# Altium PCB PCB1.PcbDoc
Units mm, origin at the board's own origin, x right, y up, seen from the top; angles counter-clockwise.
Board outline 39.93 x 25 mm, 4 copper layers (Top Layer, Layer 1, Layer 2, Bottom Layer), stack 1.883 mm thick; 39 components, 36 nets, 174 pads, 146 vias.
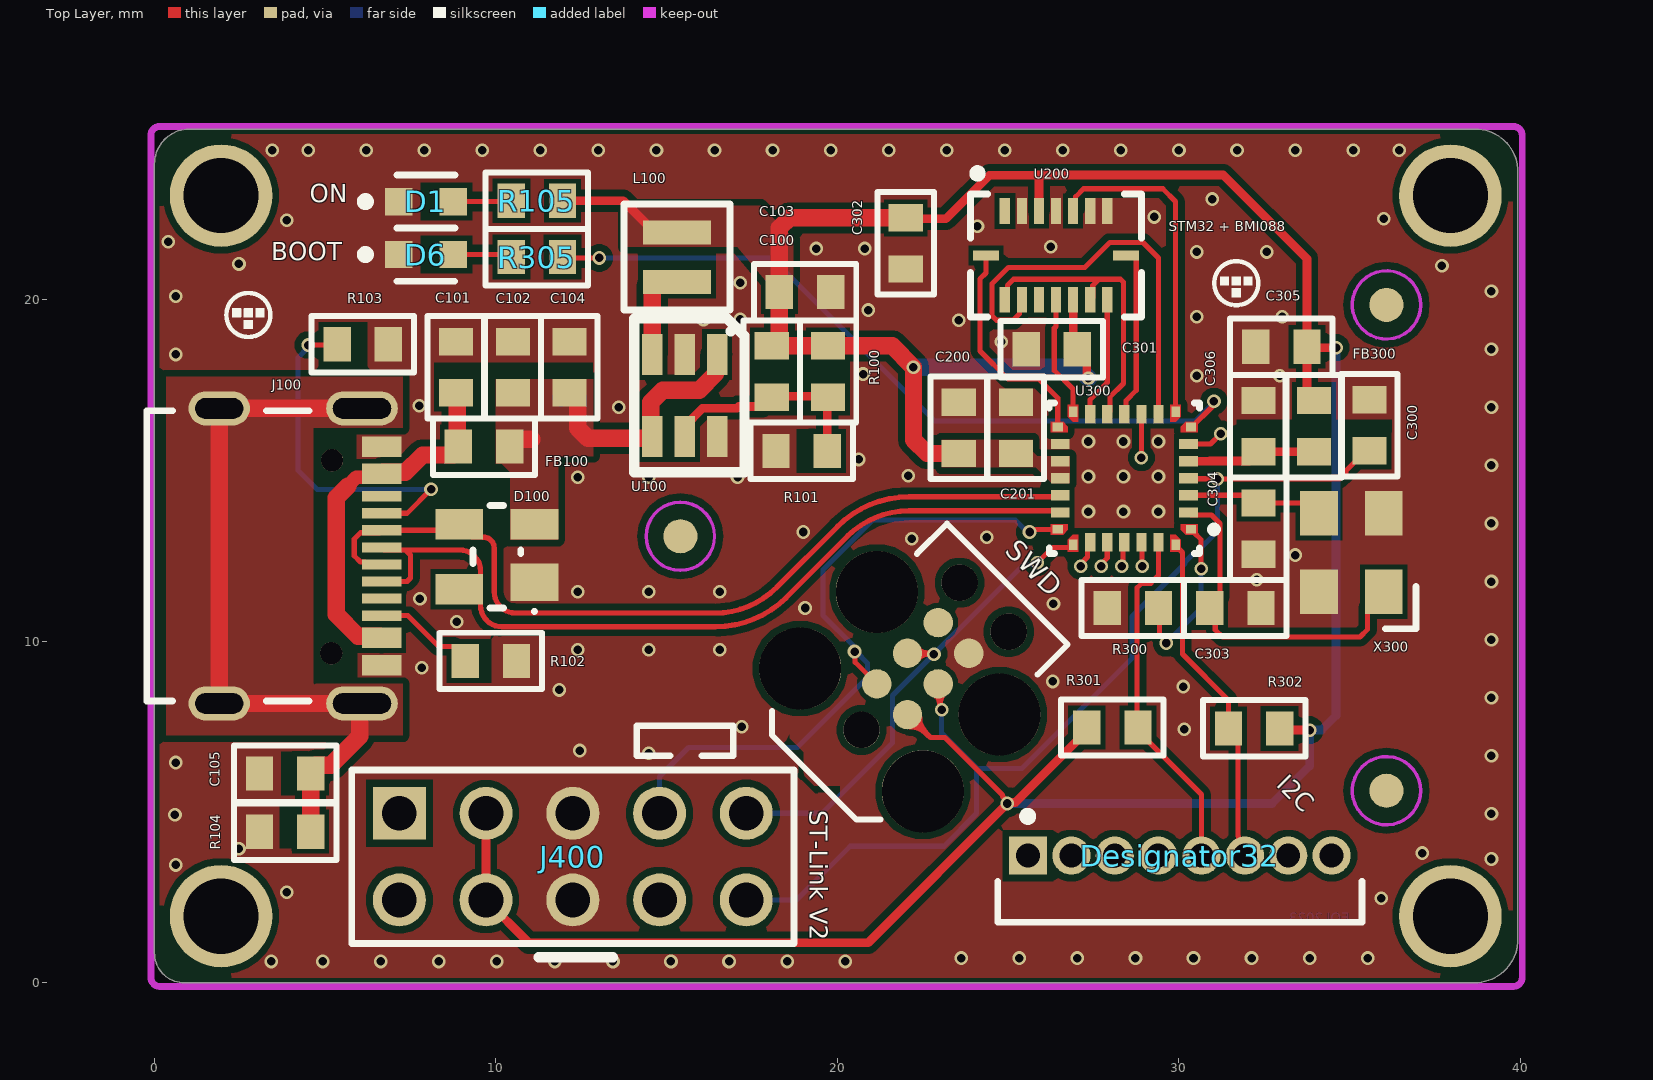
[diagram p0: Top Layer view]
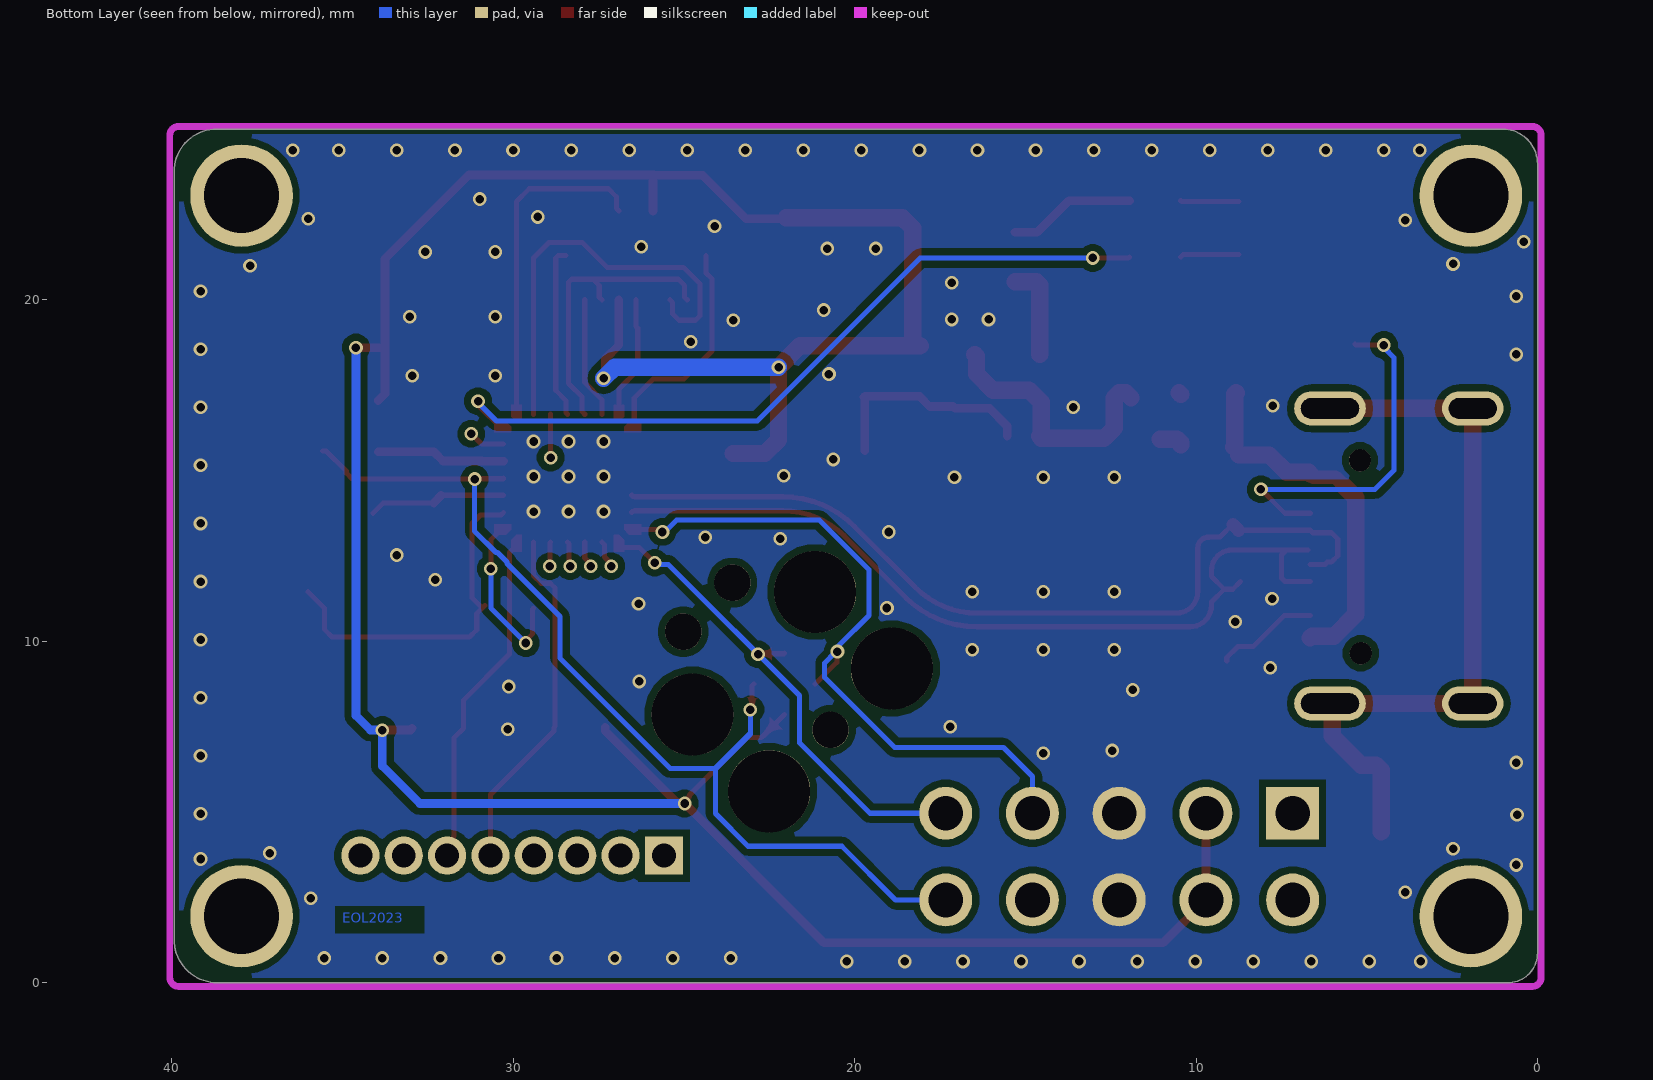
[diagram p1: Bottom Layer view, seen from below]
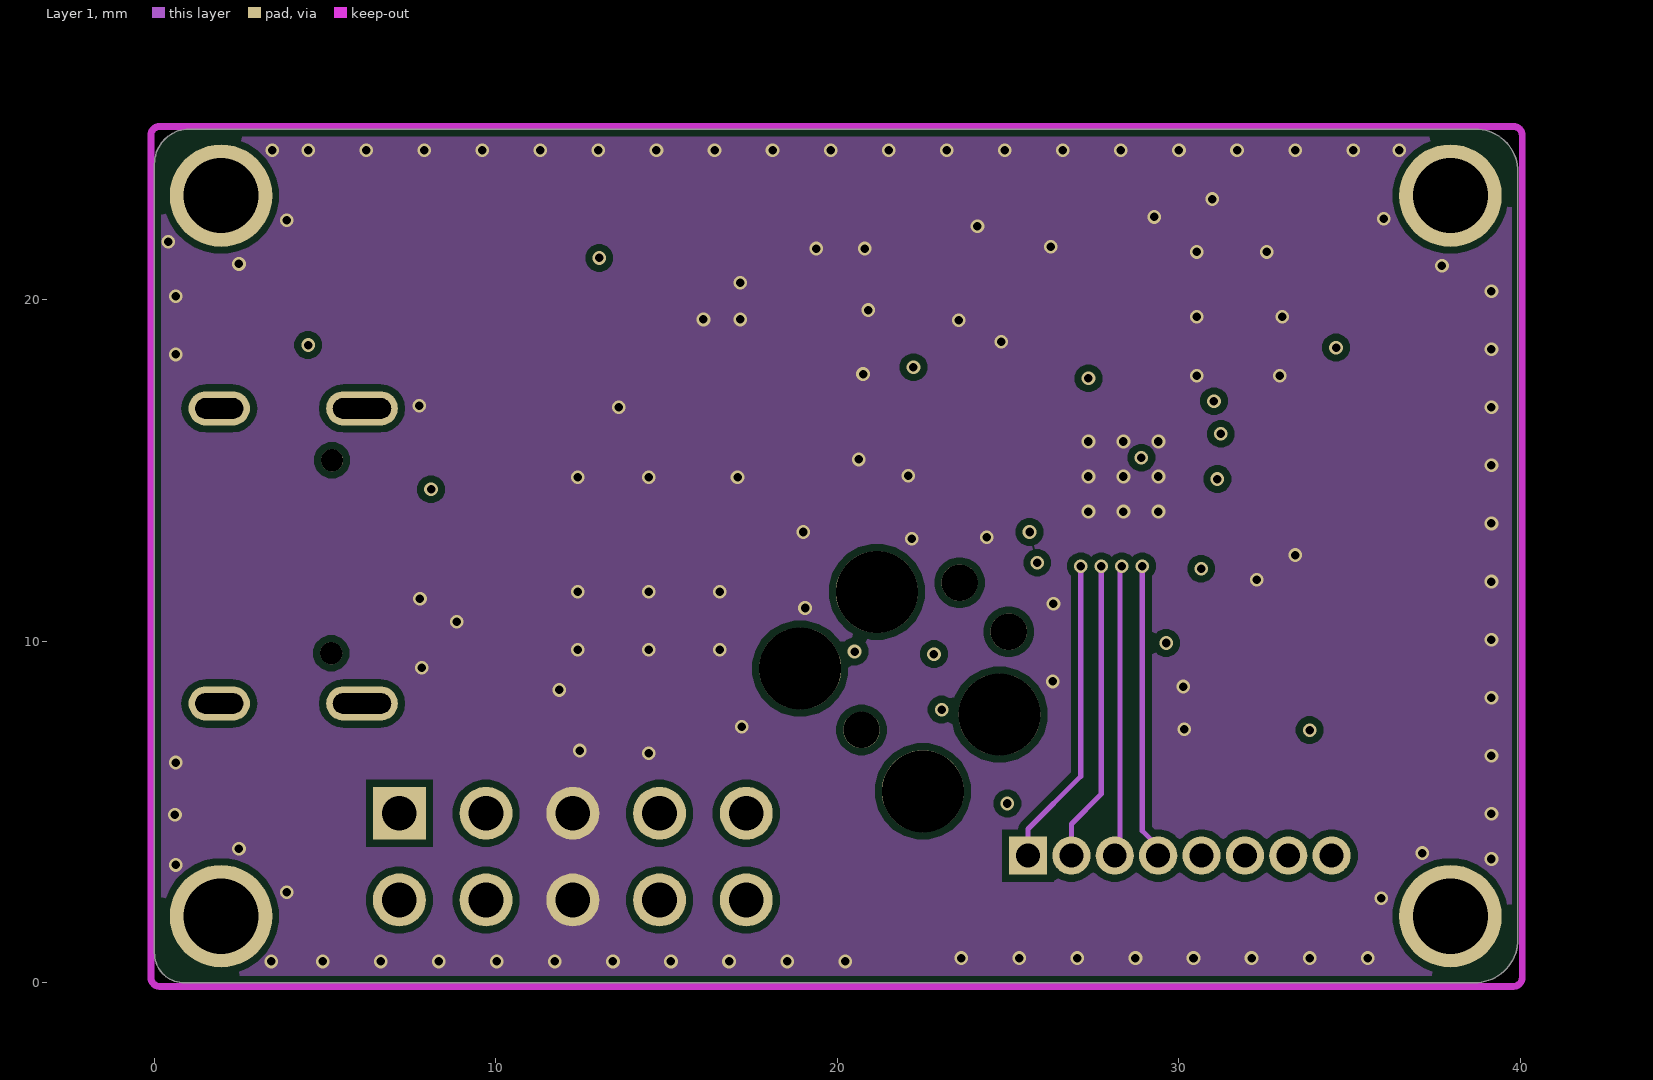
[diagram p2: Layer 1]
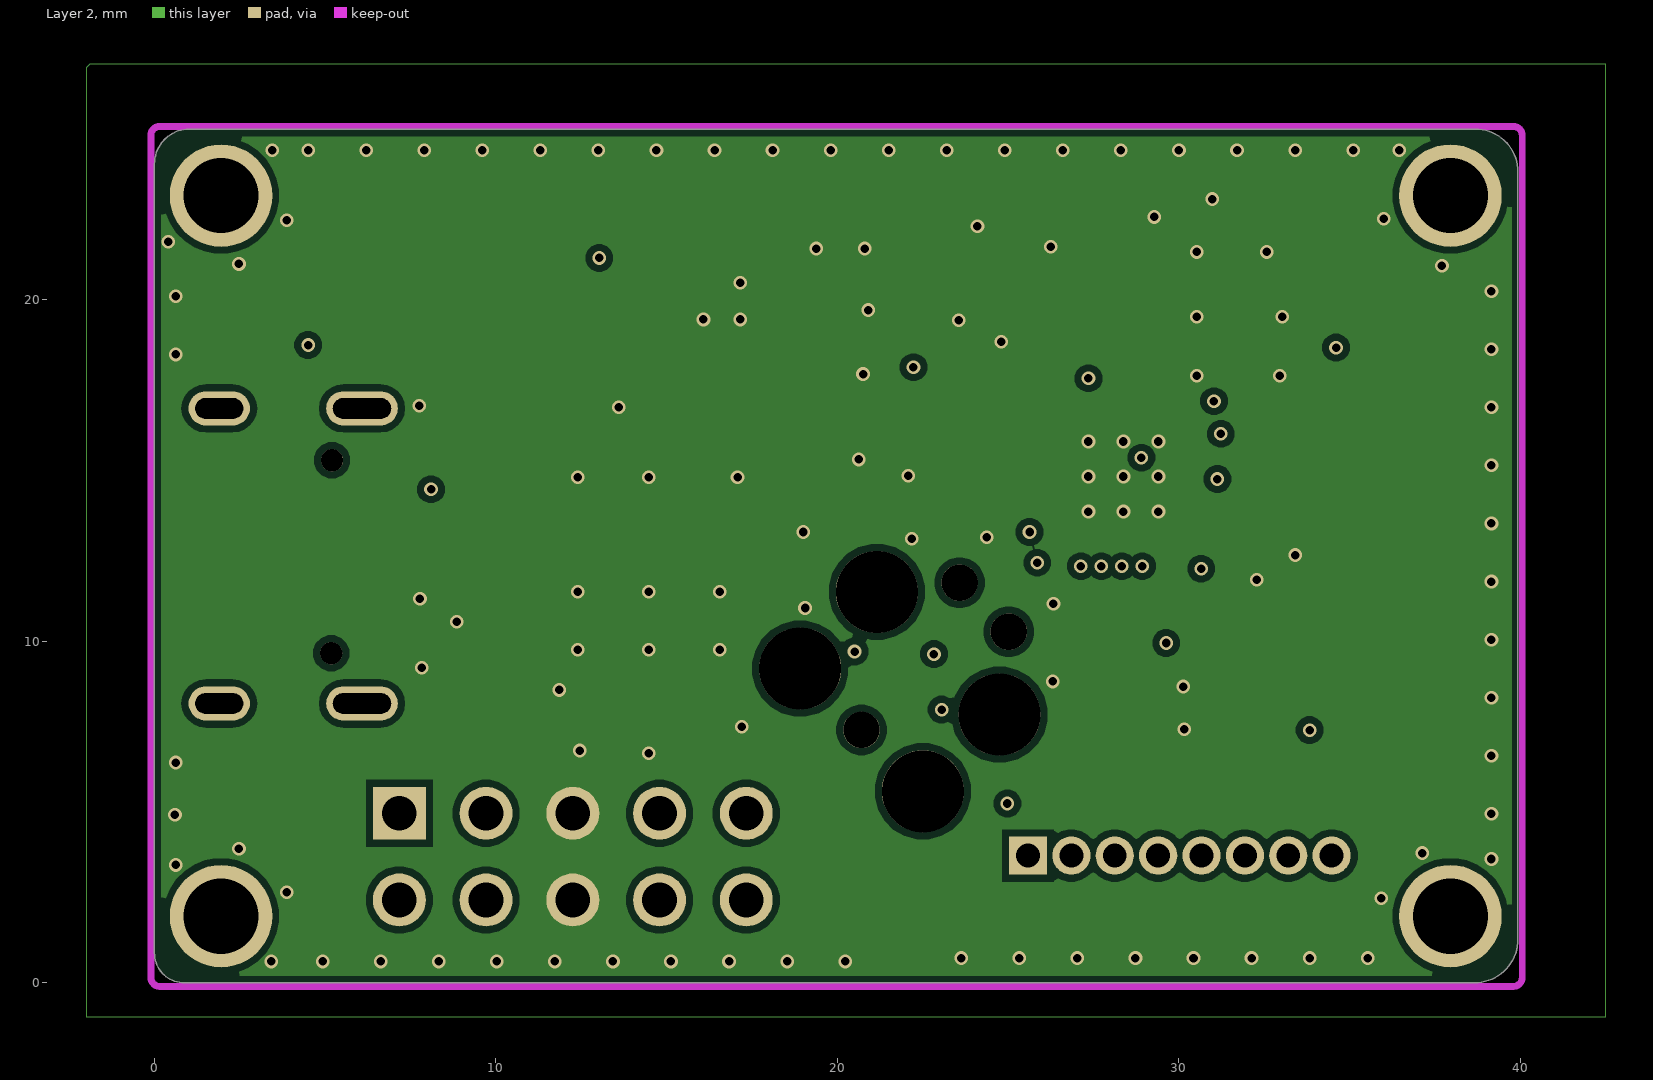
[diagram p3: Layer 2]
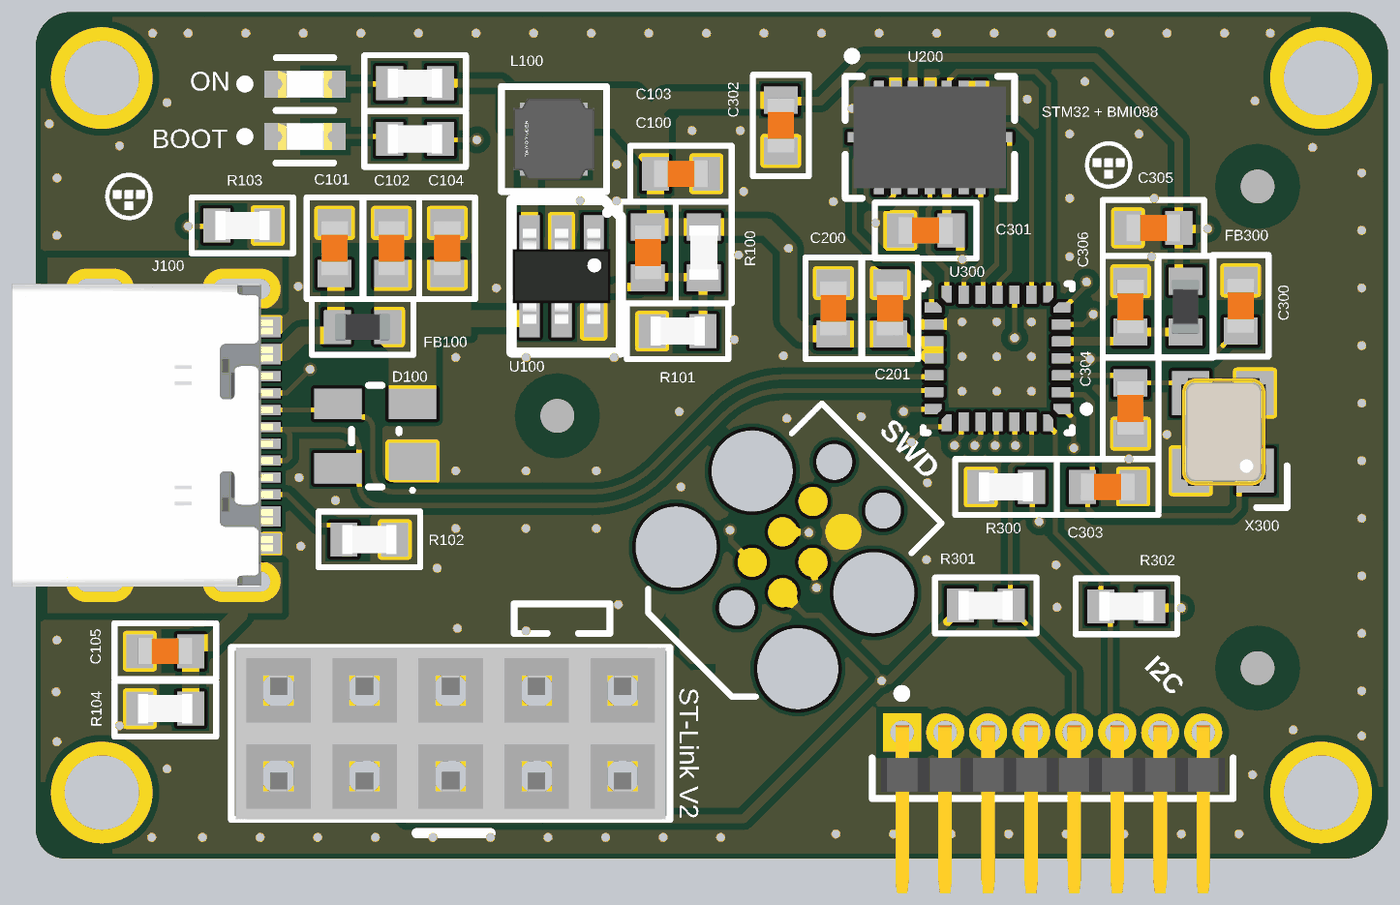
[diagram p4: 3D render of the assembled board from above, using the file's embedded part models]

## Layer stack, top to bottom
Top Solder: solder mask 0.0254, SM-001, Dk 4
Top Layer: signal copper 0.0356
Dielectric 2: prepreg 0.0711, PP-006, Dk 4.1
Layer 1: signal copper 0.035
Dielectric 1: dielectric 1.6, FR-4, Dk 4.6
Layer 2: signal copper 0.035
Dielectric 3: prepreg 0.0711, PP-006, Dk 4.1
Bottom Layer: signal copper 0.0356
Bottom Solder: solder mask 0.0254, SM-001, Dk 4

## Board outline
0,23.975 0,0.875 ccw(c0.875,0.875) 0.875,0 38.65,0 ccw(c38.65,1.275) 39.925,1.275 39.925,23.75 ccw(c38.675,23.75) 38.675,25 1.025,25 ccw(c1.025,23.975)

## Design rules (kind name [scope] priority, off if disabled: settings)
Clearance Clearance_3 [InNet('I2C_SCL') vs InNet('I2C_SDA')] p1: gap=0.2 ignorepadtopadclearanceinfootprint=FALSE except(0: Arc-Hole Track-Hole SMDPad-Hole THPad-Hole Via-Hole Fill-Hole Poly-Hole Region-Hole Text-Hole; 0.1: THPad-THPad; 0.127: SMDPad-SMDPad; 0.15: Arc-Arc Arc-Track Arc-SMDPad Track-Track Track-SMDPad SMDPad-Fill SMDPad-Poly SMDPad-Region; 0.254: Arc-Via Track-Via; 0.3: Arc-THPad Track-THPad SMDPad-THPad)
Clearance Clearance_2 [InNet('BUCK_VFB') vs InNet('+5V')] p2: gap=0.2 ignorepadtopadclearanceinfootprint=FALSE except(0: Arc-Arc Arc-Track Arc-Hole Track-Track Track-Hole SMDPad-Hole THPad-Hole Via-Hole Fill-Hole Poly-Hole Region-Hole Text-Hole; 0.15: Arc-SMDPad Track-SMDPad SMDPad-SMDPad SMDPad-Fill SMDPad-Poly SMDPad-Region; 0.3: Arc-THPad Track-THPad SMDPad-THPad THPad-THPad)
Clearance Clearance_1 [InNet('BUCK_VFB') vs InNet('GND')] p3: gap=0.2 ignorepadtopadclearanceinfootprint=FALSE except(0: Arc-SMDPad Arc-Hole Track-SMDPad Track-Hole SMDPad-Hole THPad-Hole Via-Hole Fill-Hole Poly-Hole Region-Hole Text-Hole; 0.12: Arc-Arc Arc-Track Track-Track; 0.15: SMDPad-SMDPad SMDPad-Fill SMDPad-Poly SMDPad-Region; 0.3: Arc-THPad Track-THPad SMDPad-THPad THPad-THPad)
Clearance [All] p4: gap=0.2 ignorepadtopadclearanceinfootprint=TRUE except(0: Arc-Hole Track-Hole SMDPad-Region SMDPad-Hole THPad-Hole Via-Hole Fill-Hole Poly-Hole Region-Hole Text-Hole; 0.1: Text-Text; 0.15: Arc-SMDPad Track-SMDPad SMDPad-SMDPad SMDPad-Fill SMDPad-Poly; 0.3: Arc-THPad Track-THPad SMDPad-THPad THPad-THPad)
DiffPairsRouting [All] p1: maxlimit=0.254 minlimit=0.14 mostfreqgap=0.254 toplayer_minwidth=0.153 toplayer_maxwidth=0.381 toplayer_prefwidth=0.381 midlayer1_minwidth=0.153 midlayer1_maxwidth=0.381 midlayer1_prefwidth=0.381 midlayer2_minwidth=0.153 midlayer2_maxwidth=0.381 midlayer2_prefwidth=0.381 bottomlayer_minwidth=0.153 bottomlayer_maxwidth=0.381 bottomlayer_prefwidth=0.381 maxuncoupledlength=12.7
MinimumSolderMaskSliver [All] p1: minsoldermaskwidth=0
PlaneClearance [All] p1: clearance=0.308
PolygonConnect [All] p1: connectstyle=Direct reliefconductorwidth=0.254 reliefentries=4 polygonreliefangle="90 Angle" airgapwidth=0.254
RoutingVias [All] p1: holewidth=0.2 width=0.3 viastyle="Through Hole" minholewidth=0.2 minwidth=0.3 maxholewidth=0.25 maxwidth=0.4
ShortCircuit ShortCircuit_1 [IsTrack vs InPadClass('U300-8')] p1: allowed=TRUE
ShortCircuit [All] p2: allowed=FALSE
SilkToSilkClearance [All] p1: silktosilkclearance=0.15
SilkToSolderMaskClearance [All] p1: minsilkscreentomaskgap=0 clearancetoexposedcopper=TRUE
SolderMaskExpansion [All] p1: expansion=0.102 istentingtop=FALSE
UnRoutedNet [All] p1: checkbadconnections=TRUE
UnpouredPolygon [All] p1: allowunpoured=TRUE allowshelved=TRUE
Width [All] p1: maxlimit=0.508 minlimit=0.15 preferedwidth=0.254
22 further rules are at their usual default settings.

## Classes and differential pairs
differential pair class USB_D: USB_D
differential pair class USB: USB_D
differential pair USB_D: +USB_D_P -USB_D_N

## Components (designator, comment, footprint, x,y, rotation, side; value= is the part's Value field where it differs from the comment)
C100 "4.7uF" CAP_0603 19.05,20.225 r180 top
C101 "100nF" CAP_0603 8.825,18.025 r270 top
C102 "100nF" CAP_0603 10.5,18.025 r270 top
C103 "22pF" CAP_0603 18.075,17.9 r90 top
C104 "4.7uF" CAP_0603 12.15,18.025 r270 top
C105 "2.2nF, 2Kv" CAP_0603 3.825,6.125 r180 top
C200 "100nF" CAP_0603 23.55,16.25 r270 top
C201 "100nF" CAP_0603 25.225,16.25 r270 top
C300 "100nF" CAP_0603 35.575,16.325 r270 top
C301 "100nF" CAP_0603 26.275,18.55 r0 top
C302 "100nF" CAP_0603 22,21.65 r90 top
C303 "10pF" CAP_0603 31.65,10.975 r180 top
C304 "10pF" CAP_0603 32.325,13.3 r90 top
C305 "100nF" CAP_0603 33,18.625 r0 top
C306 "100nF" CAP_0603 32.325,16.3 r270 top
D1 "150060GS75000" FP-150060GS75000-MFG 7.95,22.875 r0 top
D6 "150060GS75000" FP-150060GS75000-MFG 7.95,21.325 r0 top
D100 "SP0503BAHTG" LFUS-SOT143-4_V 10.025,12.475 r180 top
Designator32 "Comment" FP-GRPB081VWCN-RC-MFG 30.025,2.475 r0 top
FB100 "120R" FB_0603 9.65,15.7 r0 top
FB300 "120R" FB_0603 33.95,16.3 r270 top
J100 "USB4105-GF-A-060" USB4105-GF-A-060 4.275,12.5 r270 top
J400 "Comment" SMTC-BCS-105-X-D-TE 7.17,4.965 r0 top
L100 "10uH" FP-NRH2412-MFG 15.3,21.25 r90 top
R100 "887k" RES_0603 19.725,17.9 r90 top
R101 "280k" RES_0603 18.95,15.575 r0 top
R102 "5.1K" RES_0603 9.85,9.425 r0 top
R103 "5.1K" RES_0603 6.1,18.7 r0 top
R104 "1M" RES_0603 3.825,4.425 r180 top
R105 "220" RES_0603 11.2,22.9 r0 top
R300 "5.1K" RES_0603 28.65,10.975 r180 top
R301 "5.1K" RES_0603 28.05,7.475 r0 top
R302 "5.1K" RES_0603 32.2,7.45 r180 top
R305 "220" RES_0603 11.2,21.25 r180 top
SWD "TC2030" TC2030-FP 22.5,9.2 r45 top (schematic designator J300)
U100 "LTC3405ES6#TRMPBF" SOT-23-6 15.525,17.2 r180 top
U200 "BMI088" BMI088 26.4,21.3 r0 top
U300 "STM32F042G6U6" STM-UFQFPN28_V 28.4,14.775 r180 top
X300 "24MHz" XTAL_3225 35.05,12.6 r90 top

## Footprints (in the part's own frame and the unit in brackets; to place one, negate y for a bottom-side part, rotate by r counter-clockwise, add the part's x,y. Pads: shape width x height; smd on the part's side, far side on the other; paste and mask are expansions set on the pad)
BMI088 [mm]
  rect 0.3x0.75 smd: 1(-1.5,1.3) 2(-1,1.3) 3(-0.5,1.3) 4(0,1.3) 5(0.5,1.3) 6(1,1.3) 7(1.5,1.3) 9(1.5,-1.3) 10(1,-1.3) 11(0.5,-1.3) 12(0,-1.3) 13(-0.5,-1.3) 14(-1,-1.3) 15(-1.5,-1.3)
  rect 0.75x0.3 smd: 8(2.05,0) 16(-2.05,0)
  silkscreen extent -2.5,-1.8 2.5,2.51, body extent -2.25,-1.5 2.25,1.5, height 1.01
CAP_0603 [mm]
  rect 0.8x1 smd: 1(-0.75,0) 2(0.75,0)
  silkscreen extent -1.5,-0.82 1.5,0.82, body extent -0.8,-0.4 0.8,0.4, height 0.51
FB_0603 [mm]
  rect 0.8x1 smd: 1(-0.75,0) 2(0.75,0)
  silkscreen extent -1.5,-0.82 1.5,0.82, body extent -0.8,-0.4 0.8,0.4, height 0.81
FP-150060GS75000-MFG [mm]
  rect 0.8x0.8 smd paste+0 mask+0: 1(-0.8,0) 2(0.8,0)
  silkscreen extent -1.9,-0.78 0.85,0.77, body extent -1.3,-0.55 1.3,0.55, height 0.25
FP-GRPB081VWCN-RC-MFG [mm]
  rect 1.12x1.12 hole 0.7 paste-2539.97 mask+0: 1(-4.445,1.25)
  round 1.12 hole 0.7 paste-2539.97 mask+0: 2(-3.175,1.25) 3(-1.905,1.25) 4(-0.635,1.25) 5(0.635,1.25) 6(1.905,1.25) 7(3.175,1.25) 8(4.445,1.25)
  silkscreen extent -5.33,-0.7 5.33,2.52, body extent -5.43,-4 5.43,1.91, height 0.25
FP-NRH2412-MFG [mm]
  rect 0.7x2 smd paste+0 mask+0: 1(-0.725,0) 2(0.725,0)
  silkscreen extent -1.55,-1.55 1.55,1.55, body extent -1.2,-1.2 1.2,1.2, height 1.2
LFUS-SOT143-4_V [mm] "SOT143, 4-Leads, Body 3.04x1.4mm, Pitch 1.90mm"
  rect 1.4x1.1 smd: 1(-1.1,0.75)
  rect 1.4x0.9 smd: 2(-1.1,-0.95) 3(1.1,-0.95) 4(1.1,0.95)
  silkscreen extent -1.15,-1.5 0.7,1.65, body extent -0.7,-1.52 0.7,1.52, height 1.22
RES_0603 [mm]
  rect 0.8x1 smd: 1(-0.75,0) 2(0.75,0)
  silkscreen extent -1.5,-0.82 1.5,0.82, body extent -0.8,-0.43 0.8,0.43, height 0.52
SMTC-BCS-105-X-D-TE [mm] "Box Connector Socket Strip, 2x5 Pins, Vertical, 2.54mm Pitch, Female"
  rect 1.55x1.55 hole 1.02: 1(0,0)
  round 1.55 hole 1.02: 2(0,-2.54) 3(2.54,0) 4(2.54,-2.54) 5(5.08,0) 6(5.08,-2.54) 7(7.62,0) 8(7.62,-2.54) 9(10.16,0) 10(10.16,-2.54)
  silkscreen extent -1.39,-3.81 11.56,1.27, body extent -1.27,-3.81 11.43,1.27, height 7.37
SOT-23-6 [mm]
  rect 0.6x1.2 smd: 1(-0.95,-1.2) 2(0,-1.2) 3(0.95,-1.2) 4(0.95,1.2) 5(0,1.2) 6(-0.95,1.2)
  silkscreen extent -1.75,-2.25 1.47,2.25, body extent -1.45,-1.4 1.45,1.4, height 1.45
STM-UFQFPN28_V [mm] "QFN, 28-Leads, Body 4.1x4.1mm, Pitch 0.5mm"
  rect 0.3x0.25 smd: 1(-1.95,1.5) 7(-1.95,-1.5) 15(1.95,-1.5) 21(1.95,1.5)
  rect 0.55x0.3 smd: 2(-1.875,1) 3(-1.875,0.5) 4(-1.875,0) 5(-1.875,-0.5) 6(-1.875,-1) 16(1.875,-1) 17(1.875,-0.5) 18(1.875,0) 19(1.875,0.5) 20(1.875,1)
  rect 0.3x0.55 smd mask+0.1: 9(-1,-1.875)
  rect 0.3x0.55 smd: 10(-0.5,-1.875) 11(0,-1.875) 12(0.5,-1.875) 13(1,-1.875) 23(1,1.875) 24(0.5,1.875) 25(0,1.875) 26(-0.5,1.875) 27(-1,1.875)
  rect 0.25x0.3 smd: 14(1.5,-1.95) 22(1.5,1.95) 28(-1.5,1.95) ""(-1.5,-1.95)
  Top Layer region: -1.35,-2.15 -1.35,-1.65 -1.505,-1.65 -1.65,-1.795 -1.65,-2.15
  Top Layer region: 1.35,2.15 1.35,1.65 1.505,1.65 1.65,1.795 1.65,2.15
  Top Layer region: 2.15,-1.35 1.65,-1.35 1.65,-1.505 1.795,-1.65 2.15,-1.65
  Top Layer region: -2.15,1.35 -1.65,1.35 -1.65,1.505 -1.795,1.65 -2.15,1.65
  Top Layer region: 2.15,1.35 1.65,1.35 1.65,1.505 1.795,1.65 2.15,1.65
  Top Layer region: 1.35,-2.15 1.35,-1.65 1.505,-1.65 1.65,-1.795 1.65,-2.15
  Top Layer region: -1.35,2.15 -1.35,1.65 -1.505,1.65 -1.65,1.795 -1.65,2.15
  Top Layer region: -2.15,-1.35 -1.65,-1.35 -1.65,-1.505 -1.795,-1.65 -2.15,-1.65
  silkscreen extent -2.7,-2.2 2.2,2.2, body extent -2.05,-2.05 2.05,2.05, height 0.6
TC2030-FP [mm]
  round 0.863 smd paste-0.432: 1(-1.27,-0.635) 2(-1.27,0.635) 3(0,-0.635) 4(0,0.635) 5(1.27,-0.635) 6(1.27,0.635)
  round 1.067 hole 1.067 unplated: MH(-2.54,0) MH(2.54,-1.016) MH(2.54,1.016)
  round 2.4 hole 2.4 unplated: MH(-2.54,2.54) MH(-2.54,-2.54) MH(0.635,2.54) MH(0.635,-2.54)
  silkscreen extent -4.5,-2.5 3.5,2.5
USB4105-GF-A-060 [mm]
  rect 0.6x1.15 smd mask+0.05: A1B12(-3.2,2.378) A4B9(-2.4,2.378) B1A12(3.2,2.378) B4A9(2.4,2.378)
  rect 0.3x1.15 smd mask+0.05: A5(-1.25,2.378) A6(-0.25,2.378) A7(0.25,2.378) A8(1.25,2.378) B5(1.75,2.378) B6(0.75,2.378) B7(-0.75,2.378) B8(-1.75,2.378)
  round 0.65 hole 0.65 unplated mask+0.05: MH(-2.8,0.925) MH(2.85,0.9)
  oval 1x2.1 hole 0.6 slot 1.7 at 90 deg: SH(-4.32,1.803) SH(4.32,1.803)
  oval 1x1.8 hole 0.6 slot 1.4 at 90 deg: SH(-4.32,-2.377) SH(4.32,-2.377)
  silkscreen extent -4.25,-4.5 4.25,0.25, body extent -4.47,-4.97 4.47,2.73, height 3.27
XTAL_3225 [mm]
  rect 1.3x1.1 smd: 1(-1.15,-0.95) 2(1.15,-0.95) 3(1.15,0.95) 4(-1.15,0.95)
  silkscreen extent -2.23,-1.89 -1,-1, body extent -1.6,-1.28 1.6,1.22, height 0.61

## Part data
C100 C104 C105: library part CAP_0805_16V, "Capacitor SMD 0805 16V"
C101 C102 C103 C200 C201 C300 C301 C302 C303 C304 C305 C306: library part CAP_0603_16V, "Capacitor SMD 0603 16V"
D1 D6: library part CMP-1426-00002-2, "LED GREEN CLEAR 0603 SMD", Case Code (Imperial)=0603, Case Code (Metric)=1608, Color=Green, Forward Current=30mA, Forward Voltage=3.2V, Lens Color=Colorless, Max Operating Temperature=85°C, Min Operating Temperature=-40°C, Package Quantity=1, Test Current=20mA, Case/Package=0603, Dominant Wavelength=520nm, Height=0.8mm, Lead Free="Lead Free", Length=1.6mm, Lens Size=0.7mm, Lens Style=Clear, Lens Transparency=Clear, Luminous Intensity=430mcd, Mount="Surface Mount", Packaging="Cut Tape", RoHS Compliant=Yes, Series=WL-SMCW, Viewing Angle=140°, Wavelength=520nm, Width=0.8mm
D100: library part CMP-2000-05191-1, "TVS Diode Array, 30 pF, 30 KV, -40 to 85 degC, 4-Pin SOT143, RoHS, Tape and Reel", Capacitance Value=30pF, Clamping Voltage=8V, Leakage Current=0.1uA, Manufacturer=Littelfuse, Operating Temp Range=-40Cto85C, Operating Temperature Classification=Industrial, Operating Temperature Max Deg. C=85C, Operating Temperature Min Deg. C=-40C, Package / Case=SOT-143, Reverse Stand-off Voltage=5.5(Min)V, Working Voltage=5.5V, Working Voltage (Max)=5.5V(Min), Clamping Voltage (Max)=8V, Configuration=Triple, Datasheet URL=https://datasheet.ciiva.com/15143/getdatasheetpartid-116020-15143550.pdf, Datasheet Version=Dec-13, Direction Type=Uni-Directional, Leakage Current (Max)=0.1uA, Manufacturer URL=http://www.littelfuse.com/, Mounting=SurfaceMount, Mounting Style=SurfaceMount, Number of Elements=3, Package Type=SOT-143, Packaging=TapeandReel, Pin Count=3+Tab, Polarity=Uni-Directional, Product Depth (mm)=1.4mm, Product Height (mm)=1.05mm, Product Length (mm)=3.04mm, Rad Hardened=No, Suppressor Type=TVS
FB100 FB300: library part FB_0603, "Ferrite Bead SMD 0603"
J100: "USB Connector Type C SMT 12 Pin", Manufacturer=GCT, Manufacturer Part Number=USB4105-GF-A-060
L100: library part CMP-14484-000582-1, "NRH2412T100MNGH -Shielded Wirewound Inductor 10uH 20% 0.51A 0.72Ω SMD", Case/Package=Nonstandard, Current Rating=450mA, DC Resistance (DCR)=600mR, Max DC Current=810mA, Max Operating Temperature=120°C, Min Operating Temperature=-25°C, Package Quantity=2500, Self Resonant Frequency=29MHz, Test Frequency=100kHz, Tolerance=20%, Core Material=Ferrite, Halogen Free="Halogen Free", Height=1.2mm, Height - Seated (Max)=0.047inch, Inductance=10uH, Length=0.095inch, Mount="Surface Mount", Packaging="Tape and Reel", RoHS Compliant=Yes, Saturation Current=810mA, Shielding=Shielded, Termination=SMD/SMT, Width=0.095inch
R100 R101 R102 R103 R105 R300 R301 R302 R305: library part RES_0603, "Resistor SMD 0603"
R104: library part RES_0805, "Resistor SMD 0805"
SWD: "Tag-Connect No-Solder SWD Debug Connector DO NOT PLACE", Manufacturer=Tag-Connect, Manufacturer Part Number=TC2030
U100: "1.5MHz, 300mA / Synchronous Step-Down / Regulator in ThinSOT", Manufacturer="Analog Devices", Manufacturer Part Number=LTC3405ES6#TRMPBF
U200: "Inertial Measurement Unit IMU 6-Axis LGA", Manufacturer=Bosch, Manufacturer Part Number=BMI088
U300: library part CMP-0304-00112-2, "ARM Cortex-M0 32-bit MCU, 32 KB Flash, 6 KB Internal RAM, 24 I/Os, 28-Pin UFQFPN, -40 to 85 degC, Tray", I/Os (High Current)=24, Manufacturer=STMicroelectronics, Operating Frequency(F) (Processor speed) (MHz)=48, Package Description="28-Pin Ultra Thin Fine Pitch Quad Flat No-Lead, 4 x 4 x 0.6 mm Body, 0.5 mm Pitch", Package Reference=UFQFPN28, Supply Voltage(Vcc) min (V)=2, ComponentLink1Description="Manufacturer URL", ComponentLink1URL=http://www.st.com/, ComponentLink2Description=Datasheet, ComponentLink2URL=http://www.st.com/st-web-ui/static/active/en/resource/technical/document/datasheet/DM00105814.pdf, Core="ARM Cortex-M0", DatasheetVersion="Rev. 5", FLASH Size (Prog) (kB)=32, Internal RAM Size (kB)=6, Mounting Technology="Surface Mount", Packing=Tray, PartNumber=STM32F042G6U6
X300: library part TSX-3225_24.0000MF15X-AC, "Crystal SMD 24MHz 10PPM 7pF 3225", Manufacturer=Epson, Manufacturer Part Number="TSX-3225 24.0000MF15X-AC"

## Free pads (board coordinates)
  round 3 hole 2.2 unplated paste-2539.97 mask+0: MH2(1.95,1.95) MH2(1.95,23.05) MH2(37.95,1.95) MH2(37.95,23.05)
  round 1 smd mask+0: MH3(15.4,13.075) MH3(36.075,5.625) MH3(36.075,19.85)

## Via types
v1: diameter 0.4, hole 0.25, Top Layer to Bottom Layer, tented both sides, 146 vias

## Nets (pads, with @x,y where several pads share a name; then routed paths per layer and width w, separated by ;. In a path a pad name is that pad's centre, name@x,y a point inside that pad or via, vN(x,y) a via of type N, cw(c..) or ccw(c..) an arc to the next point about the centre after c; other vN are vias at no path point)
+3V3: C100.2 C103.2 C200.2 C201.2 C301.2 C302.2 C305.2 FB300.1 J400.3 J400.4 L100.2 R100.2 R105.2 R301.1 R302.1 SWD.1 U200.3 U200.11 U300.17 U300.18 | length 96.9
  Top Layer w0.15: SWD.1 22.721,7.183 23.152,7.183 24.836,5.5 24.836,5.457 24.943,5.35 v1@24.975,5.35
  Top Layer w0.254: J400.3 J400.4 10.96,1.175 20.9,1.175 25.003,5.278 25.203,5.278 27.3,7.375 R301.1 ; R105.2 13.725,22.9 14.65,21.975 L100.2 ; C302.2 22.03,22.37 22.85,22.37 23.173,22.37 23.175,22.372 23.175,22.375 24.45,23.65 25.875,23.65 ; U200.3 25.9,23.625 25.875,23.65 ; U200.11 26.9,18.675 27.298,18.277 27.298,17.792 27.35,17.74 v1(27.35,17.7) ; R302.1 33,7.4 v1(33.825,7.4) ; v1(34.6,18.6) 33.775,18.6 C305.2 ; 25.875,23.65 25.877,23.652 31.298,23.652 33.75,21.2 C305.2 ; FB300.1@33.75,17.25 FB300.1 FB300.1@33.75,17.25 ; FB300.1@33.75,17.25 C305.2
  Top Layer w0.508: C302.2 18.598,22.4 18.3,22.102 C100.2 18.3,18.796 18.154,18.65 C103.2 18.3,18.65 R100.2 21.6,18.65 v1(22.225,18.025) 22.225,15.9 22.625,15.5 C200.2
  Bottom Layer w0.254: v1(24.975,5.25) 32.725,5.25 33.825,6.35 v1(33.825,7.4) 34.175,7.4 34.6,7.825 v1(34.6,18.6)
  Bottom Layer w0.508: v1(22.225,18.025) 27.025,18.025 v1(27.35,17.7)
+3V3A: C306.2 FB300.2 U300.5 | length 3.8
  Top Layer w0.254: U300.5 30.905,15.275 30.907,15.277 32.052,15.277 C306.2 FB300.2
+5V: C102.2 C104.2 D100.2 FB100.2 U100.1 U100.4 | length 8.5
  Top Layer w0.508: FB100.2@10.45,15.75 10.45,15.819 10.546,15.915 11.054,15.915 ; C102.2@10.45,17.225 C102.2 ; C104.2@11.904,17.129 12.05,17.275 C104.2 12.25,17.275 12.396,17.129 12.396,16.244 12.694,15.946 14.529,15.946 14.529,15.954 U100.4 14.534,16.041 14.534,17.002 14.886,17.354 15.95,17.354 16.429,17.833 16.429,18.354 U100.1
BOOT0: R300.1 U300.1 | length 5
  Top Layer w0.15: R300.1 29.425,10.95 29.425,10.218 29.625,10.018 v1(29.625,9.95) ; U300.1 30.375,13.275 30.425,13.225 30.425,13.2 30.65,12.975 v1(30.65,12.125)
  Bottom Layer w0.15: v1(29.625,9.95) 30.65,10.975 v1(30.65,12.125)
BUCK_SW: L100.1 U100.3 | length 2.8
  Top Layer w0.508: U100.3 14.575,20.429 14.671,20.525 L100.1
BUCK_VFB: C103.1 R100.1 R101.2 U100.5 | length 6.5
  Top Layer w0.254: U100.5 15.525,16.3 16.05,16.825 17.067,16.825 17.119,16.877 17.802,16.877 18.1,17.175 19.7,17.175 R100.1 19.7,17.125 R101.2
GND: C100.1 C101.1 C102.1 C104.1 C105.2 C200.1 C201.1 C300.1 C301.1 C302.1 C303.1 C304.1 C305.1 C306.1 D1.1 D6.1 D100.1 J100.A1B12 J100.B1A12 J400.5 J400.6 R101.1 R102.2 R103.2 R104.2 R300.2 SWD.5 U100.2 U100.6 U200.2 U200.4 U200.6 U200.7 U300.16 X300.2 X300.4
  other v1: 3.425,0.625 4.925,0.625 6.625,0.625 8.325,0.625 10.025,0.625 11.725,0.625 13.425,0.625 15.125,0.625 16.825,0.625 18.525,0.625 20.225,0.625 23.625,0.725 25.325,0.725 27.025,0.725 28.725,0.725 30.425,0.725 32.125,0.725 33.825,0.725 35.525,0.725 35.925,2.475 3.875,2.65 0.625,3.45 39.15,3.625 37.125,3.8 2.475,3.925 0.6,4.925 39.15,4.95 0.625,6.45 39.15,6.65 14.475,6.725 12.45,6.8 30.15,7.425 17.2,7.5 39.15,8.35 11.85,8.575 30.125,8.675 26.3,8.825 7.825,9.225 12.4,9.75 14.475,9.75 16.55,9.75 39.15,10.05 8.85,10.575 19.05,10.975 26.325,11.1 7.775,11.25 12.4,11.45 14.475,11.45 16.55,11.45 39.15,11.75 32.275,11.8 33.4,12.525 22.175,13 24.375,13.05 19,13.2 39.15,13.45 27.35,13.8 28.375,13.8 29.4,13.8 12.4,14.8 14.475,14.8 17.075,14.8 27.35,14.825 28.375,14.825 29.4,14.825 22.075,14.85 39.15,15.15 20.625,15.325 27.35,15.85 28.375,15.85 29.4,15.85 13.6,16.85 39.15,16.85 7.75,16.9 30.525,17.775 32.95,17.775 20.75,17.825 0.625,18.4 39.15,18.55 24.8,18.775 23.55,19.4 16.075,19.425 17.15,19.425 30.525,19.5 33.025,19.5 20.9,19.7 0.625,20.1 39.15,20.25 17.15,20.5 37.7,21 2.475,21.05 30.525,21.4 32.575,21.4 19.375,21.5 20.8,21.5 26.25,21.55 0.4,21.7 24.1,22.15 3.875,22.325 36,22.375 29.275,22.425 30.975,22.95 3.45,24.375 4.5,24.375 6.2,24.375 7.9,24.375 9.6,24.375 11.3,24.375 13,24.375 14.7,24.375 16.4,24.375 18.1,24.375 19.8,24.375 21.5,24.375 23.2,24.375 24.9,24.375 26.6,24.375 28.3,24.375 30,24.375 31.7,24.375 33.4,24.375 35.1,24.375 36.45,24.375
I2C_SCL: Designator32.5 R301.2 U300.27 | length 10.4
  Top Layer w0.15: U300.27 29.4,11.925 29.175,11.7 28.907,11.7 28.775,11.568 28.775,7.5 R301.2 28.8,7.375 30.66,5.515 Designator32.5
I2C_SDA: Designator32.6 R302.2 U300.28 | length 9.9
  Top Layer w0.15: U300.28 29.9,12.8 30.1,12.6 30.1,9.625 31.45,8.275 R302.2 31.725,7.175 31.725,4.298 31.744,4.278 31.744,3.911 Designator32.6
IMU_INT1: U200.16 U300.15 | length 6.6
  Top Layer w0.15: U200.16 24.35,20.788 24.175,20.613 24.175,18.5 25,17.675 25.9,17.675 26.45,17.125 U300.15
IMU_INT2: U200.12 U300.14 | length 3.5
  Top Layer w0.152: U200.12 26.4,19.217 26.348,19.165 26.348,17.935 26.9,17.383 U300.14
IMU_MISO: U200.10 U200.15 U300.12 | length 8.7
  Top Layer w0.15: U200.15 24.975,20.075 24.975,20.418 25.157,20.6 27.639,20.6 ; U200.10 27.475,20.075 27.475,20.418 27.657,20.6 28.287,20.6 28.375,20.512 28.375,17.55 27.975,17.15 27.975,16.725 U300.12
IMU_MOSI: U200.9 U300.13 | length 3.6
  Top Layer w0.15: U300.13 27.4,17.075 27.9,17.575 U200.9
IMU_NCS_ACC: U200.14 U300.9 | length 12.5
  Top Layer w0.15: U200.14 25.325,19.925 25.325,19.582 25.143,19.4 24.657,19.4 24.525,19.532 24.525,20.468 25.007,20.95 27.25,20.95 27.975,21.675 28.95,21.675 29.4,21.225 U300.9
IMU_NCS_GYR: U200.5 U300. | length 9.8
  Top Layer w0.15: U200.5 26.975,22.675 26.975,23.018 27.207,23.25 29.525,23.25 29.9,22.875 U300.
IMU_SCK: U200.8 U300.11 | length 5.1
  Top Layer w0.15: U300.11 28.447,16.697 28.447,17.047 28.75,17.35 28.75,21.225 28.675,21.3 U200.8
NetC101_2: C101.2 FB100.1 J100.A4B9 J100.B4A9 | length 10.7
  Top Layer w0.308: 5.663,14.544 5.663,14.617
  Top Layer w0.408: 5.663,14.544 5.922,14.804 6.557,14.804 J100.A4B9
  Top Layer w0.508: 5.663,14.544 5.32,14.201 5.32,10.787 5.96,10.146 6.607,10.146 J100.B4A9 ; J100.A4B9 6.699,14.946 7.345,14.946 7.853,15.454 FB100.1@8.754,15.454 ; C101.2 8.863,17.237 8.863,15.737 FB100.1
NetC105_1: C105.1 J100.SH R104.1 | length 21.6
  Top Layer w0.508: R104.1 4.575,6.225 4.721,6.371 5.166,6.371 6.011,7.216 6.011,8.113 6.078,8.18 1.898,8.18 1.898,16.82 J100.SH@6.078,16.82
NetD1_2: D1.2 R105.1 | length 1.7
  Top Layer w0.153: D1.2 10.425,22.875 R105.1
NetD6_2: D6.2 R305.2 | length 1.7
  Top Layer w0.153: D6.2 10.375,21.325 R305.2
NetR305_1: R305.1 U300.7 | length 22.4
  Top Layer w0.153: R305.1 11.975,21.225 v1(13.025,21.225) ; U300.7 30.375,16.275 30.978,16.878 30.978,16.983 v1(31.025,17.03)
  Bottom Layer w0.153: v1(13.025,21.225) 18.075,21.225 22.85,16.45 30.485,16.45 31.025,16.99 v1(31.025,17.03)
NRST: C300.2 J400.10 SWD.3 U300.4 | length 31.4
  Top Layer w0.15: SWD.3 23.002,8.698 23.002,8.048 v1(23.05,8)
  Top Layer w0.153: U300.4 30.287,14.763 31.113,14.763 v1(31.125,14.75) 34.7,14.75 34.884,14.934 34.884,14.984 35.475,15.575 C300.2
  Bottom Layer w0.15: J400.10 18.8,2.425 20.375,4 23.119,4 24.075,4.956 24.075,6.26 23.05,7.285 23.05,7.321 ; v1(23.05,8) 23.05,7.321 ; v1(31.125,14.75) 31.125,13.225 30.5,12.6 30.453,12.6 30.175,12.322 30.175,12.275 28.625,10.725 28.625,9.506 25.397,6.278 24.093,6.278 23.05,7.321
OSC_IN: C303.2 U300.2 X300.1 | length 10.4
  Top Layer w0.15: U300.2 30.35,13.7 30.95,13.7 31.2,13.45 31.2,11.275 C303.2 ; C303.2@30.825,11.05 C303.2 ; X300.1 35.525,10.975 35.525,10.35 35.3,10.125 31.275,10.125 31.062,10.338 31.062,10.813 C303.2
OSC_OUT: C304.2 U300.3 X300.3 | length 4
  Top Layer w0.15: C304.2 33.8,14.05 X300.3
  Top Layer w0.153: U300.3 30.926,14.275 30.928,14.274 32.099,14.274 C304.2@32.1,14.275
  Top Layer w0.254: C304.2@32.1,14.275 C304.2
PA0: Designator32.8 U300.6 | length 1.1
  Top Layer w0.15: U300.6 30.924,15.775 v1(31.225,16.075)
PA4: Designator32.7 U300.10 | length 1.3
  Top Layer w0.15: v1(28.9,15.375) U300.10
PA15: Designator32.1 U300.23 | length 9.9
  Top Layer w0.15: v1(27.125,12.2) 27.125,12.268 27.325,12.468 27.325,12.825 U300.23
  Layer 1 w0.15: Designator32.1 25.58,4.505 27.125,6.05 v1(27.125,12.2)
PB3: Designator32.2 U300.24 | length 9.6
  Top Layer w0.15: v1(27.725,12.2) 27.725,12.268 27.9,12.443 U300.24
  Layer 1 w0.15: Designator32.2 26.85,4.65 27.725,5.525 v1(27.725,12.2)
PB4: Designator32.3 U300.25 | length 9.3
  Top Layer w0.15: v1(28.325,12.2) 28.362,12.237 28.362,12.862 U300.25
  Layer 1 w0.15: Designator32.3 28.277,3.882 28.277,12.152 v1(28.325,12.2)
PB5: Designator32.4 U300.26 | length 9.4
  Top Layer w0.15: U300.26 28.912,12.888 28.912,12.213 v1(28.925,12.2)
  Layer 1 w0.15: v1(28.925,12.2) 28.925,4.452 29.39,3.987 Designator32.4
SWCLK: J400.9 SWD.4 U300.22 | length 14.4
  Top Layer w0.15: SWD.4 22.063,9.637 22.813,9.637 v1(22.825,9.625) ; v1@25.852,12.298 26.304,12.75 26.85,12.75 26.9,12.8 U300.22
  Bottom Layer w0.15: J400.9 19.55,4.965 21.612,7.028 21.612,8.412 25.452,12.252 25.802,12.252 v1(25.85,12.3)
SWDIO: J400.7 SWD.2 U300.21 | length 20.9
  Top Layer w0.15: v1(20.5,9.7) 20.518,9.682 20.518,9.386 SWD.2 ; v1(25.625,13.2) 25.693,13.2 25.768,13.275 U300.21
  Bottom Layer w0.15: J400.7 14.79,6.04 15.64,6.89 18.826,6.89 20.875,8.94 20.875,9.368 20.587,9.655 v1@20.587,9.7 ; v1(20.5,9.7) 20.452,9.748 20.452,9.883 19.578,10.757 19.578,12.097 21.031,13.55 25.207,13.55 25.557,13.2 v1(25.625,13.2)
USB_CC1: J100.A5 R103.1 | length 10.5
  Top Layer w0.15: v1(4.5,18.675) 5.325,18.675 R103.1 ; J100.A5 7.4,13.75 v1(8.1,14.45)
  Bottom Layer w0.15: v1(4.5,18.675) 4.5,18.603 4.2,18.303 4.2,15.01 4.76,14.45 v1(8.1,14.45)
USB_CC2: J100.B5 R102.1 | length 3.1
  Top Layer w0.15: J100.B5 7.425,10.75 8.325,9.85 8.775,9.85 9.1,9.525 R102.1
USB_D_N: D100.3 J100.A7 J100.B7 U300.19 | length 25.4
  Top Layer w0.153: D100.3 9.299,13.051 9.624,13.051 9.625,13.05
  Top Layer w0.154: J100.A7 6.228,12.25 6.155,12.323 6.033,12.323 5.851,12.506 5.851,12.994 6.033,13.177 6.58,13.177 J100.B7 D100.3@8.75,13.25 ; 9.625,13.05 cw(c9.625,12.725) 9.95,12.725 9.95,11.45 ccw(c10.575,11.45) 10.575,10.825 16.404,10.825 ccw(c16.404,13.392) 18.22,11.577 20.008,13.366 cw(c22.093,11.281) 22.093,14.229 26.414,14.229 ccw(c26.414,14.386) U300.19
  Top Layer w0.381: D100.3@8.75,13.25 D100.3
USB_D_P: D100.4 J100.A6 J100.B6 U300.20 | length 25.4
  Top Layer w0.154: J100.B6 7.4,11.75 7.5,11.85 7.5,12.525 7.35,12.675 ; J100.A6@6.727,12.675 7.35,12.675 ; D100.4@8.7,11.75 D100.4 D100.4@9.175,11.525 ; U300.20 ccw(c26.414,13.664) 26.414,13.821 22.093,13.821 ccw(c22.093,11.281) 20.297,13.077 18.508,11.288 cw(c16.424,13.373) 16.424,10.425 10.175,10.425 cw(c10.175,11.05) 9.55,11.05 9.548,11.052 9.548,11.152 D100.4@9.175,11.525 ; 7.35,12.675 8.938,12.675 cw(c8.938,12.063) 9.55,12.063 9.548,12.061 9.548,11.898 D100.4@9.175,11.525
pads on no net: J100.A8 J100.B8 J100.MH J400.1 J400.2 J400.8 SWD.6 SWD.MH U200.1 U200.13

## Polygon pours and split planes (outlines as drawn)
+3V3 on Top Layer "GND_L01_P-001" (solid, remove dead copper, pour order 22): 26.275,14.625 26.8,14.625 26.8,15.425 25.85,15.425 25.725,15.55 25.725,15.9 23.05,15.9 23.05,15.1 25.8,15.1
GND on Top Layer "GND_L01_P-001" (solid, remove dead copper, pour order 19): 0.15,24.85 0.15,0.15 39.775,0.15 39.775,24.85
+5V on Top Layer "GND_L01_P-001" (solid, remove dead copper, pour order 13): 10,15.2 10.175,15.2 10.425,14.95 10.425,12.975 11.825,12.975 11.825,15.35 11.9,15.425 12.85,15.425 12.85,17.675 10,17.675
NetC105_1 on Top Layer "GND_L01_P-001" (solid, remove dead copper, pour order 0): 4.65,16.25 7.275,16.25 7.275,17.75 0.35,17.75 0.35,7.25 7.275,7.25 7.275,8.75 4.725,8.75 4.7,8.725 4.65,8.775
+3V3 on Top Layer "GND_L01_P-001" (solid, remove dead copper, pour order 14): 13.775,21.55 17.068,21.55 17.906,20.563 18.7,20.563 18.7,21.8 17.75,22.75 13.775,22.75
GND on Bottom Layer "GND_L01_P-001" (solid, remove dead copper, pour order 17): 0.125,24.85 0.125,0.15 39.775,0.15 39.775,24.85
GND on Layer 2 "GND_L01_P-001" (solid, remove dead copper, pour order 25): -1.5,26 -1.5,-1.5 40.5,-1.5 40.5,26
GND on Layer 2 "GND_L01_P-001" (solid, remove dead copper, shelved, pour order 23): -2,26.8 -2,-1 42.5,-1 42.5,26.9 -1.9,26.9
GND on Layer 1 "GND_L01_P-001" (solid, remove dead copper, pour order 24): -1,26.5 -1,-1 41,-1 41,26.5

## Keep-outs
Top Layer:
  circle w0.1: c36.075,19.85 r1
  circle w0.1: c36.075,5.625 r1
  lines w0.1: 16.4,13.075 ccw(c15.4,13.075) 16.4,13.075
Keep-Out Layer:
  lines w0.2: -0.104,0.15 ccw(c0.15,0.15) 0.15,-0.104 39.796,-0.104 ccw(c39.796,0.15) 40.05,0.15 40.05,24.821 ccw(c39.796,24.821) 39.796,25.075 0.15,25.075 ccw(c0.15,24.821) -0.104,24.821 -0.104,0.15

## Other copper
Top Layer:
  pour cut-out: 18.8,16.225 18.8,14.925 19.15,14.925 19.15,16.225
  pour cut-out: 18.725,16.842 19.075,16.842 19.075,16.6 18.725,16.6
  pour cut-out: 5.9,19.35 6.25,19.35 6.25,18.05 5.9,18.05
  pour cut-out: 7.8,23.425 7.8,22.325 8.2,22.325 8.2,23.425
  pour cut-out: 7.8,21.875 7.8,20.775 8.2,20.775 8.2,21.875
  pour cut-out: 5.928,15.35 5.928,15.317 5.581,15.317 5.552,15.288 5.481,15.359 5.425,15.359 5.425,15.517 5.197,15.745 5.084,15.745 5.004,15.825 4.854,15.825 4.854,16.046 4.858,16.05 5.928,16.05
  pour cut-out: 5.95,9.65 5.95,8.95 4.858,8.95 4.854,8.954 4.854,9.077 4.896,9.077 4.981,9.162 5.018,9.125 5.279,9.125 5.359,9.205 5.472,9.205 5.7,9.433 5.7,9.621 5.721,9.642 5.721,9.645 5.753,9.645 5.803,9.695 5.848,9.65 6.125,9.65
  pour cut-out: 3.65,5.225 4,5.225 4,3.925 3.65,3.925 3.65,5.225
  pour cut-out: 9.65,8.775 9.875,8.775 9.875,10.075 9.65,10.075 9.65,8.775
  pour cut-out: 4.025,6.775 3.7,6.775 3.7,5.475 4.025,5.475 4.025,6.775
  pour cut-out: 12.85,18.175 8.175,18.175 8.175,17.825 12.85,17.825 12.85,17.875
  pour cut-out: 34.6,15.214 34.669,15.214 34.717,15.166 34.95,15.399 34.95,16.1 36.25,16.1 36.25,16.525 36.225,16.5 34.6,16.5
  pour cut-out: 31.675,16.1 32.975,16.1 32.975,15.883 33.3,15.883 33.3,16.1 34.6,16.1 34.6,16.5 31.675,16.5
  pour cut-out: 9.85,16.725 9.987,16.725 9.987,16.401 9.864,16.278 9.812,16.278 9.812,16.216 9.796,16.2 9.812,16.184 9.812,15.088 9.85,15.05 9.45,15.05 9.45,16.35 9.325,16.35 9.325,16.725 9.475,16.725 9.475,17.825 9.85,17.825 9.475,17.825 9.85,17.825
  pour cut-out: 18.593,7.257 18.593,7.157 19,6.75 19,6.075 19.325,5.75 20.065,5.75 20.065,5.497 20.008,5.44 19.942,5.44 19.801,5.582 19.444,5.582 19.418,5.555 19.346,5.555 19.214,5.687 18.951,5.95 18.924,5.95 18.839,6.035 18.839,6.122 18.871,6.154 18.871,6.511 18.619,6.763 18.505,6.763 18.404,6.864 18.404,6.959 18.385,6.979 18.496,7.09 18.496,7.297 18.496,7.09
  pour cut-out: 17.245,4.515 17.348,4.515 17.398,4.464 17.459,4.525 17.705,4.525 17.746,4.484 17.804,4.484 17.804,4.519 17.876,4.591 17.797,4.671 17.797,4.792 17.7,4.889 17.6,4.889 17.581,4.907 17.505,4.831 17.505,4.775
  pour cut-out: 14.15,21.025 16.45,21.025 16.45,21.35 14.175,21.35 14.15,21.325
  pour cut-out: 18.725,17.675 18.725,17.508 19.075,17.508 19.075,17.7 20.375,17.7 20.375,18.1 19.075,18.1 19.075,18.175 18.725,18.175 18.725,18.075 17.425,18.075 17.425,17.675 17.425,18.075 17.425,17.675
Bottom Layer:
  text "EOL2023" at 35,1.65 h0.5

## Silkscreen, mask and mechanical layers (free items; w line width, h text height)
Top Overlay:
  drawing of 16 lines, arcs and shapes, not listed
  text "ON" at 4.55,22.685 h0.9
  text "STM32 + BMI088" at 29.7,21.906 h0.5
  text "BOOT" at 3.425,20.985 h0.9
  text "I2C" at 32.698,5.657 h0.9 r315
  text "ST-Link V2" at 19.01,5.05 h0.9 r270
Mechanical 1:
  lines w0.1: 0,0 9.981,0 29.944,0 39.925,0 39.925,25 0,25 0,0

## Dimensions
0.025,25.325 to 39.925,25 on Mechanical 13
-0.8,24.975 to -1.7,0.025 on Mechanical 13